# Altium PCB MCU_project.PcbDoc
Units mil, origin at the board's own origin, x right, y up, seen from the top; angles counter-clockwise.
Board outline 2320.01 x 2455.03 mil, 2 copper layers (Top Layer, Bottom Layer); 50 components, 37 nets, 208 pads, 1 vias.
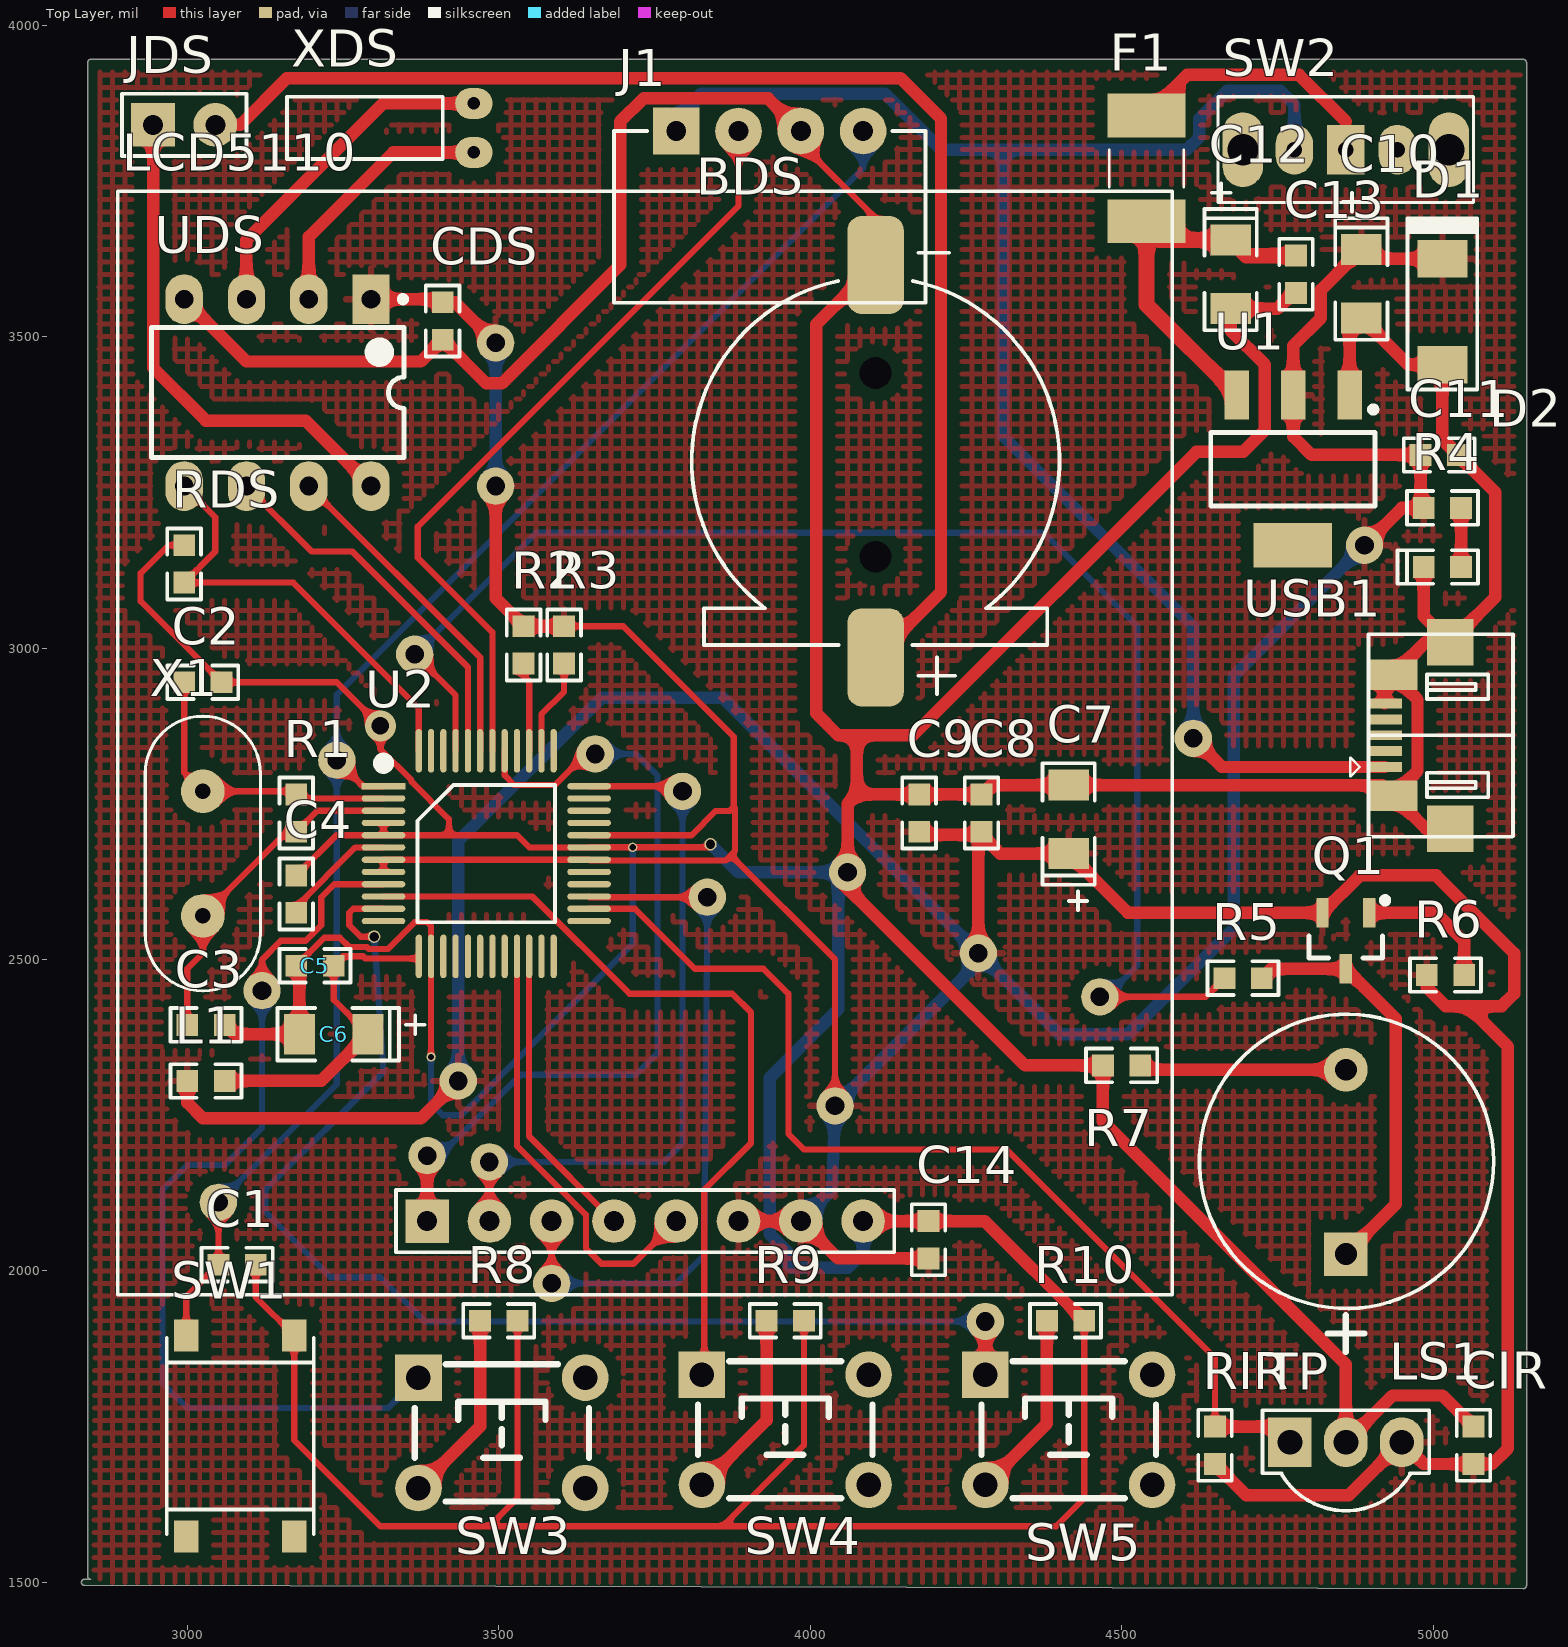
[diagram p0: Top Layer view]
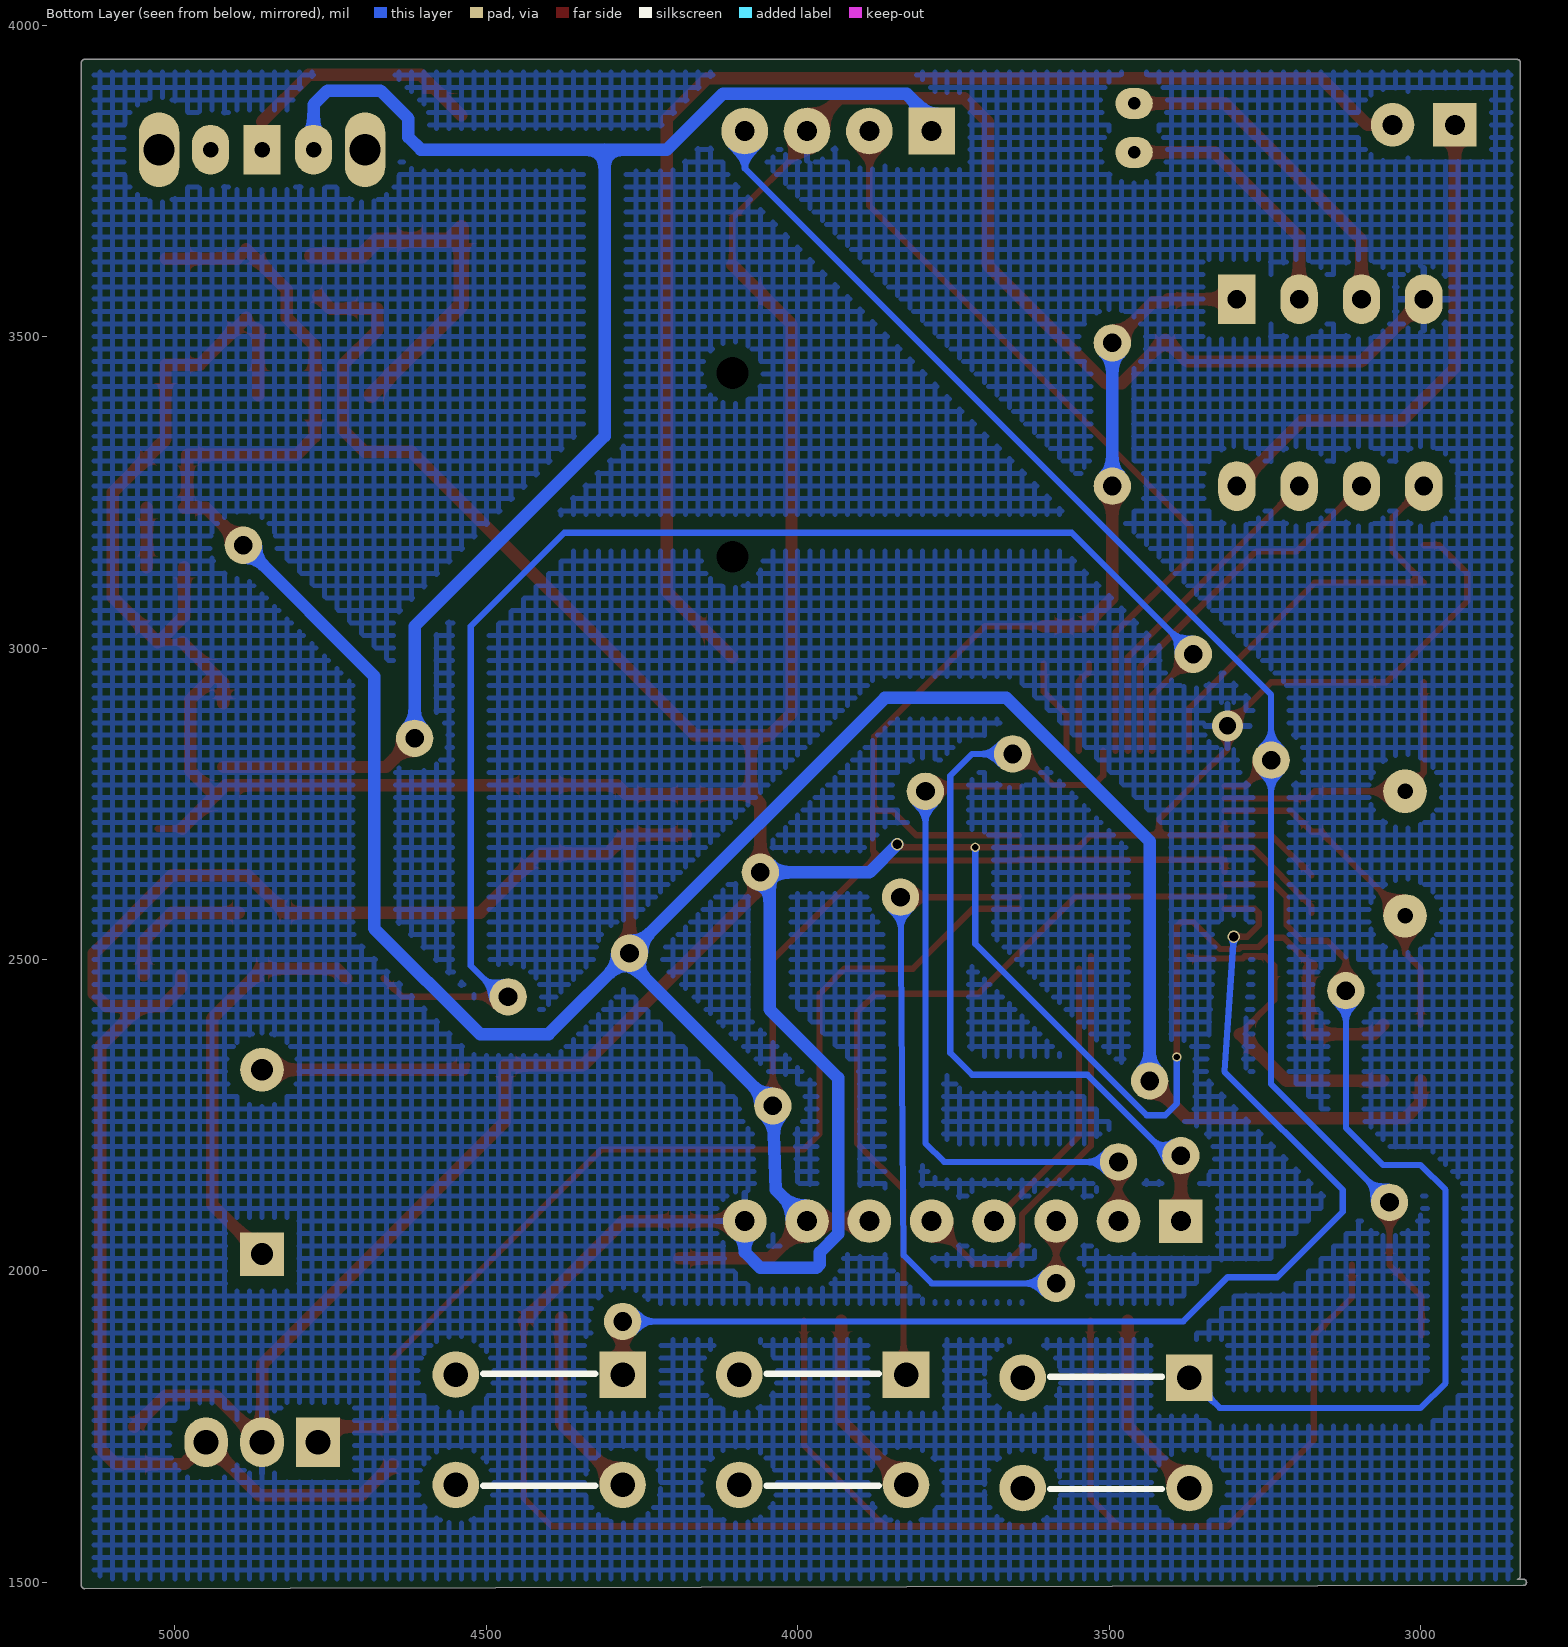
[diagram p1: Bottom Layer view, seen from below]

## Layer stack, top to bottom
Top Solder: solder mask 0.4, Solder Resist, Dk 3.5
Top Layer: signal copper 1.4
Dielectric 1: dielectric 12.6, FR-4, Dk 4.8
Bottom Layer: signal copper 1.4
Bottom Solder: solder mask 0.4, Solder Resist, Dk 3.5

## Board outline
2834.99,1494.98 cw(c2835,1500) 2835.01,1505.02 2844.7,1504.99 cw(c2845,1510) 2839.99,1510 2839.99,3940 cw(c2845,3940) 2845,3945.01 5145,3945.01 cw(c5145,3940) 5150.02,3940 5150.02,1495 cw(c5145,1495) 5144.99,1489.98

## Design rules (kind name [scope] priority, off if disabled: settings)
Clearance [All] p1: gap=5 except(20: Arc-Poly Track-Poly SMDPad-Poly THPad-Poly Via-Poly Fill-Poly Poly-Poly)
DiffPairsRouting [All] p1: maxlimit=10 minlimit=5 mostfreqgap=10 toplayer_minwidth=15 toplayer_maxwidth=15 toplayer_prefwidth=15 bottomlayer_minwidth=15 bottomlayer_maxwidth=15 bottomlayer_prefwidth=15 maxuncoupledlength=500
PolygonConnect [All] p1: connectstyle=Relief reliefconductorwidth=10 reliefentries=4 polygonreliefangle="90 Angle" airgapwidth=10
RoutingVias [All] p1: holewidth=28 width=50 viastyle="Through Hole" minholewidth=28 minwidth=50 maxholewidth=28 maxwidth=50
SolderMaskExpansion [All] p1: expansion=4
Width [All] p1: maxlimit=40 minlimit=5 preferedwidth=10 minimp=50.000000 maximp=50.000000 favimp=50.000000
29 further rules are at their usual default settings.

## Components (designator, comment, footprint, x,y, rotation, side; value= is the part's Value field where it differs from the comment)
BDS "CR1220" CR1220-贴片 4105,3300 r0 top
C1 "CAP - 无极性" 0603 3080,2010 r180 top
C2 "CAP - 无极性" 0603 3025,2945 r180 top
C3 "CAP - 无极性" 0603 3030,2395 r180 top
C4 "CAP - 无极性" 0603 3175,2605 r270 top
C5 "CAP - 无极性" 0603 3205,2490 r180 top
C6 "CAP - 有极性" 1206(-+) 3235,2380 r0 top
C7 "CAP - 有极性" 1206(-+) 4415,2725 r270 top
C8 "CAP - 无极性" 0603 4275,2735 r90 top
C9 "CAP - 无极性" 0603 4175,2735 r90 top
C10 "CAP - 有极性" 1206(-+) 4885,3585 r90 top
C11 "CAP - 无极性" 0603 5010,3310 r0 top
C12 "CAP - 有极性" 1206(-+) 4675,3600 r90 top
C13 "CAP - 无极性" 0603 4780,3600 r90 top
C14 "CAP - 无极性" 0603 4190,2050 r90 top
CDS "CAP - 无极性" 0603 3410,3525 r270 top
CIR "CAP - 无极性" 0603 5065,1720 r90 top
D1 "SS14" SMA 5015,3540 r90 top
D2 "LED绿" 0603(+-) 5015,3130 r180 top
F1 "FUSE" 1812 4540,3770 r270 top
J1 "ST-Link" HEADER_1*4P_XH2.54_卧式 3935,3830 r90 top
JDS "HEADER_1*2P" HEADER_1*2P 2995,3840 r90 top
L1 "L磁珠/电感" 0603 3030,2305 r0 top
LCD5110 "LCD5110" LCD5110 3735,2080 r0 top
LS1 "蜂鸣器" 蜂鸣器 4860,2175 r90 top
Q1 "SS8550" SOT23-3N 4860,2530 r180 top
R1 "Res - SMD" 0603 3175,2735 r90 top
R2 "Res - SMD" 0603 3540,3005 r90 top
R3 "Res - SMD" 0603 3605,3005 r90 top
R4 "Res - SMD" 0603 5015,3225 r0 top
R5 "Res - SMD" 0603 4695,2470 r0 top
R6 "Res - SMD" 0603 5020,2475 r180 top
R7 "Res - SMD" 0603 4500,2330 r0 top
R8 "Res - SMD" 0603 3500,1920 r180 top
R9 "Res - SMD" 0603 3960,1920 r0 top
R10 "Res - SMD" 0603 4410,1920 r0 top
RDS "Res - SMD" 0603 2995,3135 r90 top
RIR "Res - SMD" 0603 4650,1720 r90 top
SW1 "Switch - 轻触" "Switch - 轻触SMD_4Pins" 3085,1735 r270 top
SW2 "Switch - 拨动-三脚两档" "Switch - 拨动-三脚两档" 4860,3800 r0 top
SW3 "6x6x5" "TSW DIP-6*6*6" 3505,1740 r0 top
SW4 "6x6x5" "TSW DIP-6*6*6" 3960,1745 r0 top
SW5 "6x6x5" "TSW DIP-6*6*6" 4415,1745 r0 top
TP "TL1838" 红外遥控接收头 4860,1725 r0 top
U1 "AMS1117" SOT223_L 4775,3295 r90 top
U2 "STM8S105C6T6" LQFP48 3480,2670 r0 top
UDS "DS1302" DIP-8 3145,3410 r270 top
USB1 "USB-5P" USB-MICRO_A 5015,2860 r90 top
X1 "石英晶振" XTAL(4.88mm) 3025,2670 r90 top
XDS "石英晶振" XTAL(圆柱型2*6mm) 3460,3835 r180 top

## Footprints (in the part's own frame and the unit in brackets; to place one, negate y for a bottom-side part, rotate by r counter-clockwise, add the part's x,y. Pads: shape width x height; smd on the part's side, far side on the other; paste and mask are expansions set on the pad)
0603 [mil]
  rect 35x35 smd: 1(-30,0) 2(30,0)
  silkscreen extent -57,-27 57,27, body extent -30,-15 30,15, height 20
0603(+-) [mil]
  rect 35x35 smd: 1(-30,0) 2(30,0)
  silkscreen extent -57,-27 72,27, body extent -30,-15 30,15, height 20
1206(-+) [mil]
  rect 50x65 smd: 1(55,0) 2(-55,0)
  silkscreen extent -90,-42 146,42, body extent -59,-28 59,28, height 63
1812 [mil]
  rect 70x125 smd: 1(-85,0) 2(85,0)
  silkscreen extent -30,-60 30,60, body extent -90,-60 90,60, height 30
CR1220-贴片 [mm]
  round 0 hole 1.3: 0(0,3.6) 0(0,-3.9)
  rrect50% 2.3x4 smd: 1(0,-8) 2(0,8)
  silkscreen extent -7.5,-9.5 7.5,8.5
DIP-8 [mil]
  rect 80x60 hole 30: 1(-150,150)
  oval 80x60 hole 30: 2(-150,50) 3(-150,-50) 4(-150,-150) 5(150,-150) 6(150,-50) 7(150,50) 8(150,150)
  silkscreen extent -155,-203 104,206, body extent -142,-203 142,203, height 210
HEADER_1*2P [mil]
  rect 70x70 hole 32: 1(0,50)
  round 70 hole 32: 2(0,-50)
  silkscreen extent -50,-100 50,100, body extent -50,-100 50,100, height 457
HEADER_1*4P_XH2.54_卧式 [mil]
  rect 75x75 hole 32: 1(0,150)
  round 75 hole 32: 2(0,50) 3(0,-50) 4(0,-150)
  silkscreen extent -276,-250 0,250, body extent -14,-164 14,164, height 457
LCD5110 [mil]
  rect 70x70 hole 32: 1(-350,0)
  round 70 hole 32: 2(-250,0) 3(-150,0) 4(-50,0) 5(50,0) 6(150,0) 7(250,0) 8(350,0)
  silkscreen extent -846,-118 846,1654, body extent -846,-118 846,1654, height 551
LQFP48 [mil]
  rect 70x10 smd: 1(-165,108.27)
  oval 70x10 smd: 2(-165,88.58) 3(-165,68.9) 4(-165,49.21) 5(-165,29.53) 6(-165,9.84) 7(-165,-9.84) 8(-165,-29.53) 9(-165,-49.21) 10(-165,-68.9) 11(-165,-88.58) 12(-165,-108.27) 25(165,-108.27) 26(165,-88.58) 27(165,-68.9) 28(165,-49.21) 29(165,-29.53) 30(165,-9.84) 31(165,9.84) 32(165,29.53) 33(165,49.21) 34(165,68.9) 35(165,88.58) 36(165,108.27)
  oval 10x70 smd: 13(-108.27,-165) 14(-88.58,-165) 15(-68.9,-165) 16(-49.21,-165) 17(-29.53,-165) 18(-9.84,-165) 19(9.84,-165) 20(29.53,-165) 21(49.21,-165) 22(68.9,-165) 23(88.58,-165) 24(108.27,-165) 37(108.27,165) 38(88.58,165) 39(68.9,165) 40(49.21,165) 41(29.53,165) 42(9.84,165) 43(-9.84,165) 44(-29.53,165) 45(-49.21,165) 46(-68.9,165) 47(-88.58,165) 48(-108.27,165)
  silkscreen extent -173,-110 110,153, body extent -134,-135 135,134, height 61
SMA [mil]
  rect 60x80 smd: 1(-85,0) 2(85,0)
  silkscreen extent -125,-56 150,56, body extent -89,-50 91,50, height 78
SOT23-3N [mm] "3x1.3x1mm(长宽高)"
  rect 0.5x1.2 smd: 1(-0.95,-1.143) 2(0.95,-1.143) 3(0,1.143)
  silkscreen extent -1.73,-1.78 1.5,0.7, body extent -1.5,-1.2 1.5,1.2, height 1.05
SOT223_L [mm]
  rect 2x1 smd: 1(2.819,-2.314) 2(2.819,-0.014) 3(2.819,2.286)
  rect 1.8x3.2 smd: 4(-3.302,0)
  silkscreen extent -1.7,-3.4 2.36,3.35, body extent -2.05,-3.35 1.65,3.35, height 1.7
"Switch - 拨动-三脚两档" [mil]
  oval 65x120 hole 50: 0(-165.35,0) 4(165.35,0)
  oval 60x80 hole 25: 1(-82.68,0) 3(82.68,0)
  rect 60x80 hole 25: 2(0,0)
  silkscreen extent -205,-85 205,85, body extent -168,-80 170,80, height 280
"Switch - 轻触SMD_4Pins" [mm]
  rect 1.3x1 smd: 1(-4.1,2.2) 2(-4.1,-2.2) 3(4.1,-2.2) 4(4.1,2.2)
  silkscreen extent -4,-3 4,3, body extent -3.03,-2.97 2.97,3.03, height 4.57
"TSW DIP-6*6*6" [mm] "6*6*6mm"
  rect 1.9x1.9 hole 1: 1(-3.4,2.25)
  round 1.9 hole 1: 2(-3.4,-2.25) 3(3.4,-2.25) 4(3.4,2.25)
  silkscreen extent -3.56,-2.79 3.56,2.79, body extent -4.11,-3 4.11,3, height 5.95
USB-MICRO_A [mm] "micro型USB ，5.9*8.2*2.5mm"
  rect 0.4x1.4 smd: 1(-1.296,2.355) 2(-0.648,2.355) 3(0,2.355) 4(0.648,2.355) 5(1.295,2.355)
  rect 1.9x1.9 smd: 5(-3.81,-0.312) 5(3.784,-0.312)
  rect 1.25x2 smd: 5(-2.464,2.025) 5(2.464,2.025)
  silkscreen extent -4.14,-2.89 4.11,3.75, body extent -3.98,-2.77 3.98,2.65, height 2.69
XTAL(4.88mm) [mil]
  round 70 hole 25: 1(-100,0) 2(100,0)
  silkscreen extent -220,-93 220,93, body extent -216,-92 217,92, height 130
XTAL(圆柱型2*6mm) [mil]
  oval 60x50 hole 20: 1(0,39.37) 2(0,-39.37)
  silkscreen extent 50,-50 300,50
红外遥控接收头 [mil]
  rect 70x80 hole 40: 1(-89.76,0)
  oval 70x80 hole 40: 2(0,0) 3(89.76,0)
  silkscreen extent -134,-110 134,51
蜂鸣器 [mil]
  rect 70x70 hole 35: 1(-148,0)
  round 70 hole 35: 2(148,0)
  silkscreen extent -305,-237 237,235, body extent -228,-231 230,228, height 354

## Part data
BDS: library part Battery
D1: library part "Diode - Normal"
D2: library part LED
F1: library part FUSE保险丝
J1: library part HEADER_1*4P_1
Q1: library part 8550-SMD, "高频放大-PNP型"
SW3 SW4 SW5: library part "TSW DIP-6x6", "直插6x6轻触开关"
TP: library part TL1838-红外解码
USB1: "微型USB母座"
XDS: library part 石英晶振_1

## Free pads (board coordinates)
  round 60 hole 30: 2(3585,1980) 3(3835,2600) 4(3485,2175) 6(3795,2770) 7(3385,2185) 8(3655,2830) 9(3050,2110) 10(3240,2820) 11(3120,2450) 12(4281.14,1918.86) 14(3365,2990) 15(4465,2440) 17(3435,2305) 18(4040,2265) 19(4270,2510) 20(4890,3165) 25(4615,2855) 27(3495,3260) 28(3495,3490) 30(4060,2640)
  round 20 hole 15: 13(3300,2536.67) 29(3840,2685)
  round 15 hole 10: 31(3391.42,2343.58) 31(3715,2680)

## Via types
v1: diameter 50, hole 28, Top Layer to Bottom Layer, 1 vias

## Nets (pads, with @x,y where several pads share a name; then routed paths per layer and width w, separated by ;. In a path a pad name is that pad's centre, name@x,y a point inside that pad or via, vN(x,y) a via of type N, cw(c..) or ccw(c..) an arc to the next point about the centre after c; other vN are vias at no path point)
3.3V: C7.1 C8.1 C9.1 C10.1 C11.1 C14.1 CDS.1 CIR.1 D1.2 L1.1 LCD5110.6 LCD5110.7 pad.17 pad.18 pad.19 pad.20 pad.27 pad.28 Q1.2 R2.2 R3.2 R4.1 R6.2 RIR.1 TP.3 U1.2 U2.7 U2.8 U2.30 U2.32 UDS.1 | length 10423.6
  Top Layer w10: U2.8 U2.7 U2.30 3646.37,2658.79 3863.79,2658.79 3872.5,2667.5 ; R3.2 3700,3035 3877.42,2857.58 3877.42,2745 ; U2.32 3809.53,2699.53 3848.56,2738.56 3870.98,2738.56 3877.42,2745 ; pad.18 4040,2500 3872.5,2667.5 ; 3872.5,2667.5 3879.11,2674.11 3879.11,2716.69 3879.11,2743.31 3877.42,2745
  Top Layer w20: L1.1 3000,2270 3025,2245 3375,2245 pad.17 ; UDS.1 3405,3560 CDS.1 3430,3555 pad.28 ; pad.27 3495,3080 R2.2 R3.2 ; LCD5110.6 LCD5110.7 4045,2020 C14.1 ; C9.1@4180,2700 C8.1@4275,2700 ; pad.19 4270,2695 C8.1@4275,2700 ; RIR.1 4700,1640 4864.76,1640 TP.3 4984.76,1690 CIR.1 5095,1690 5120,1715 5120,2360 5055,2425 ; pad.20 4950,3225 R4.1 4980,3230 C11.1 4805,3310 4775.55,3339.45 U1.2 4775.55,3485.55 4820,3530 4820,3575 C10.1 4900,3625 D1.2 ; R6.2 4990,2455 5020,2425 5055,2425 ; C8.1@4275,2700 4305,2670 C7.1 4510,2575 Q1.2 4882.6,2635 5005,2635 5130,2510 5130,2445 5110,2425 5055,2425
  Bottom Layer w20: pad.17 3435,2690 3665,2920 3860,2920 pad.19 ; pad.27 pad.28 ; LCD5110.7 4035,2130 pad.18 4270,2495 pad.19 ; pad.20 4680,2955 4680,2550 4510,2380 4400,2380 pad.19
BEEP: pad.14 pad.15 R5.1 U2.45 | length 2334.5
  Top Layer w10: pad.14 3430.79,2924.21 U2.45 ; pad.15 4635,2440 R5.1
  Bottom Layer w10: pad.14 3560,3185 4375,3185 4525,3035 4525,2490 pad.15@4460,2425
GND: BDS.2 C1.1 C2.1 C3.1 C4.1 C5.2 C6.2 C7.2 C8.2 C9.2 C10.2 C11.2 C12.2 C13.1 C14.2 CDS.2 CIR.2 D1.1 D2.2 J1.3 LCD5110.8 pad.29 pad.30 pad.31 R7.1 R8.1 R9.2 R10.2 RDS.2 SW1.1 TP.2 U1.1 U2.4 U2.5 U2.14 U2.31 UDS.4 USB1.5 | length 14962.5
  Top Layer w10: RDS.2 2970,3165 2925,3120 2925,3075 C2.1 3240,2945 v1(3310,2875) 3310,2837.41 3360,2787.41 3360,2785 3420,2725 3420,2699.53 ; C1.1 3110,1958.03 SW1.1 3171.61,1728.39 3310,1590 3485,1590 ; C5.2 3220,2535 3245,2535 3260,2520 3288.38,2520 3291.72,2516.67 3321.67,2516.67 3365,2560 3385,2560 3391.42,2553.58 U2.14 pad.31@3391.42,2343.58 ; C4.1 3239.53,2699.53 U2.5 ; U2.4 U2.5 ; R8.1 3530,1635 3485,1590 ; pad.29@3840,2680 3715,2680 3645.16,2680 U2.31 3549.21,2679.84 3529.53,2699.53 3420,2699.53 ; J1.3 3985,3810 4105,3690 BDS.2 ; R9.2 3990,1720 3860,1590 ; R10.2 4440,1635 4395,1590 3860,1590 ; C10.2@4866.1,3511.1 C10.2 ; 4987.28,3008.99 USB1.5@5027.28,3008.99 ; 4988.28,2709.99 USB1.5@5027.28,2709.99 ; U2.5 3420,2699.53 ; 3485,1590 3860,1590
  Top Layer w20: UDS.4 3095,3460 3375,3460 CDS.2 3480,3425 3505,3425 3695,3615 3695,3845 3732.5,3882.5 3932.5,3882.5 J1.3 ; C3.1 3075,2380 C6.2 3180,2485 C5.2 ; LCD5110.8 C14.2 4280,2080 R10.2 ; BDS.2 4010,3519.96 4010,2895 4045,2860 4075,2860 ; C13.1@4770,3565 4750,3545 C12.2 4675,3510 4730,3455 4730,3350 4695,3315 4620,3315 4165,2860 4075,2860 ; U1.1 C10.2@4866.1,3511.1 ; C10.2 4960,3455 D1.1 5015,3335 C11.2 5100,3250 5100,3081.72 5027.28,3008.99 4985,3051.27 D2.2 ; USB1.5@4922.28,2910.99 4922.28,2943.99 USB1.5@4935.28,2956.99 ; 4987.28,3008.99 USB1.5@4935.28,2956.99 ; 4988.28,2709.99 USB1.5@4935.28,2762.99 ; CIR.2 5015,1800 4935,1800 TP.2 4860,1850 4470,2240 R7.1 4345,2330 4060,2615 pad.30 4060,2750 4075,2765 ; 4075,2765 C9.2 C8.2 4290,2780 C7.2 4918.27,2780 USB1.5@4935.28,2762.99 ; 4075,2765 4075,2860 ; USB1.5@4935.28,2762.99 4975,2802.72 4975,2917.27 USB1.5@4935.28,2956.99
  Bottom Layer w10: pad.31@3391.42,2343.58 3391.42,2268.58 3410,2250 3440,2250 3715,2525 pad.31@3715,2680
  Bottom Layer w20: pad.29 3885,2640 pad.30 4045,2625 4045,2420 3935,2310 3935,2059.29 3964.29,2030 3964.29,2010.71 3970,2005 4060,2005 4085,2030 LCD5110.8
INFR: RIR.2 TP.1 U2.26 | length 1676.2
  Top Layer w10: U2.26 3718.58,2581.42 3815,2485 3925,2485 3965,2445 3965,2220 3990,2195 4315,2195 4650,1860 RIR.2
  Top Layer w20: RIR.2 4745.24,1750 TP.1
LCD-D0: LCD5110.4 U2.22 | length 461.5
  Top Layer w10: U2.22@3548.58,2485 3548.58,2216.42 LCD5110.4
LCD-D1: LCD5110.5 U2.21 | length 698.3
  Top Layer w10: U2.21 3529.21,2200.79 3640,2090 3640,2036.36 3665,2011.36 3716.36,2011.36 LCD5110.5
LCD-EN: LCD5110.3 pad.2 pad.3 U2.27 | length 1129.1
  Top Layer w10: pad.2 LCD5110.3 ; U2.27 3646.1,2600 pad.3
  Bottom Layer w10: pad.2 3785,1980 3830,2025 pad.3
LCD-R/W: LCD5110.2 pad.4 pad.6 U2.36 | length 1140.9
  Top Layer w10: LCD5110.2 pad.4 ; U2.36 3786.73,2778.27 pad.6
  Bottom Layer w10: pad.4 3765,2175 3795,2205 pad.6 pad.6@3795,2775
LCD-RS: LCD5110.1 pad.7 pad.8 U2.41 | length 1325
  Top Layer w10: U2.41 3509.53,2795.47 3525,2780 3590,2780 3640,2830 pad.8
  Top Layer w20: LCD5110.1 pad.7
  Bottom Layer w10: pad.7 3405,2185 3535,2315 3720,2315 3755,2350 3755,2795 3720,2830 pad.8 pad.8@3645,2830
NetBDS_1: BDS.1 JDS.2 | length 2131.4
  Top Layer w20: JDS.2 3085,3840 3160,3915 4145,3915 4210,3850 4210,3090.04 BDS.1
NetC2_2: C2.2 R1.2 U2.2 X1.2 | length 482.2
  Top Layer w10: C2.2 2995,2800 X1.2 3170,2770 R1.2 3181.42,2758.58 U2.2
NetC3_2: C3.2 R1.1 U2.3 X1.1 | length 545.3
  Top Layer w10: C3.2 3000,2485 3025,2510 X1.1 3160,2705 R1.1 3208.9,2738.9 U2.3
NetC4_2: C4.2 U2.6 | length 189.3
  Top Layer w10: C4.2 3175,2585 3269.84,2679.84 U2.6
NetC5_1: C5.1 C6.1 L1.2 U2.13 | length 539.6
  Top Layer w10: C6.1 3235,2435 C5.1 3250,2505 3282.17,2505 3285.5,2501.67 3368.4,2501.67 U2.13
  Top Layer w20: L1.2 3215,2305 C6.1
NetC12_1: C12.1 C13.2 F1.2 U1.3 | length 587.7
  Top Layer w25: U1.3 4540,3551 4540,3675 4560,3655 C12.1 4700,3630 C13.2
NetD2_1: D2.1 R4.2 | length 95
  Top Layer w20: D2.1 R4.2
NetF1_1: F1.1 SW2.2 | length 423
  Top Layer w10: SW2.2 4860,3845
  Top Layer w20: F1.1 4605,3920 4785,3920 4860,3845
NetJDS_1: JDS.1 UDS.8 | length 818.7
  Top Layer w20: JDS.1 2945,3450 3030,3365 3190,3365 UDS.8
NetLS1_1: LS1.1 Q1.3 R5.2 | length 665.5
  Top Layer w20: R5.2 4740,2485 Q1.3 4940,2405 4940,2107 LS1.1
NetLS1_2: LS1.2 R7.2 | length 332.9
  Top Layer w10: R7.2 R7.2@4537,2323
  Top Layer w20: R7.2@4537,2323 LS1.2
NetQ1_1: Q1.1 R6.1 | length 226.2
  Top Layer w20: Q1.1 5005,2575 5050,2530 R6.1
NetR2_1: R2.1 U2.39 | length 146.8
  Top Layer w10: R2.1@3532.5,2975 3532.5,2962.5 3548.9,2946.1 U2.39
NetR3_1: R3.1 U2.38 | length 155.1
  Top Layer w10: U2.38 3568.58,2893.58 3605,2930 R3.1
NetR8_2: R8.2 SW3.2 | length 309.5
  Top Layer w20: SW3.2 3470,1750.28 R8.2
NetR9_1: R9.1 SW4.2 | length 306.6
  Top Layer w20: SW4.2 3930,1760.28 R9.1
NetR10_1: R10.1 SW5.2 | length 309.5
  Top Layer w20: SW5.2 4380,1755.28 R10.1@4380,1925
NetUDS_2: UDS.2 XDS.1 | length 421.2
  Top Layer w20: UDS.2 3195,3660 3330.63,3795.63 XDS.1
NetUDS_3: UDS.3 XDS.2 | length 550.9
  Top Layer w20: UDS.3 3095,3655 3314.37,3874.37 XDS.2
NRST: C1.2 J1.4 pad.9 pad.10 SW1.2 U2.1 | length 2476
  Top Layer w10: SW1.2 2998.39,1958.39 C1.2 pad.9 ; pad.10 3281.73,2778.27 U2.1
  Bottom Layer w10: pad.9 3240,2300 pad.10 3240,2925 4085,3770 J1.4
PA3: pad.11 SW3.1 U2.9 | length 1485.6
  Top Layer w10: pad.11@3120,2465 3120,2500 3150,2530 3190,2530 3215,2555 3215,2600 3235.79,2620.79 U2.9
  Bottom Layer w10: pad.11 3120,2230 3060,2170 3000,2170 2960,2130 2960,1820 3000,1780 3322.56,1780 SW3.1
PA4: SW4.1 U2.10 | length 1283.4
  Top Layer w10: U2.10 3553.9,2601.1 3710,2445 3875,2445 3905,2415 3905,2205 3830,2130 3830,1833.58 SW4.1
PA5: pad.12 pad.13 SW5.1 U2.11 | length 1960.5
  Top Layer w10: pad.13 3278.33,2536.67 3260,2555 3260,2575 3266.42,2581.42 U2.11
  Top Layer w20: SW5.1 pad.12
  Bottom Layer w10: pad.13 3315,2320 3125,2130 3125,2095 3230,1990 3310,1990 3381.14,1918.86 pad.12
RTC-CLK: U2.43 UDS.7 | length 539
  Top Layer w10: UDS.7 3470.16,2984.84 U2.43
RTC-I/O: U2.44 UDS.6 | length 610.3
  Top Layer w10: UDS.6 3200,3155 3265,3155 3450.47,2969.53 U2.44
RTC-RST: RDS.1 U2.48 UDS.5 | length 725
  Top Layer w10: UDS.5 3045,3210 3045,3155 RDS.1 3170,3105 3371.73,2903.27 U2.48
SWIM: J1.2 U2.42 | length 1258
  Top Layer w10: U2.42 3489.84,3025.16 3370,3145 3370,3195 3885,3710 J1.2
VCC_USB: J1.1 pad.25 SW2.1 USB1.1 | length 2602.5
  Top Layer w20: pad.25 4661.01,2808.99 USB1.1
  Bottom Layer w10: J1.1 J1.1@3785,3850
  Bottom Layer w20: J1.1@3785,3850 3825,3890 4120,3890 4210,3800 4310,3800 ; pad.25 4615,3035 4310,3340 4310,3800 ; SW2.1 4777.32,3872.32 4754.65,3895 4670,3895 4625,3850 4625,3820 4605,3800 4310,3800
pads on no net: BDS.0 SW1.3 SW1.4 SW2.0 SW2.3 SW2.4 SW3.3 SW3.4 SW4.3 SW4.4 SW5.3 SW5.4 U1.4 U2.12 U2.15 U2.16 U2.17 U2.18 U2.19 U2.20 U2.23 U2.24 U2.25 U2.28 U2.29 U2.33 U2.34 U2.35 U2.37 U2.40 U2.46 U2.47 USB1.2 USB1.3 USB1.4

## Polygon pours and split planes (outlines as drawn)
GND on Bottom Layer "AutoNaming" (hatched 90Degree grid 20 track 8, pour order 12): 2855,3930 2860,3925 5130,3925 5130,1520 5125,1515 5115,1505 2855,1505
3.3V on Top Layer "AutoNaming" (hatched 90Degree grid 20 track 8, pour order 14): 2860,3925 5135,3925 5140,3920 5130,3910 5130,1500 2865,1500 2850,1515

## Silkscreen, mask and mechanical layers (free items; w line width, h text height)
Mechanical 1:
  lines w10: 2845,3935 5135,3935 5140,3940 5140,1505 2850,1505 2850,3930 2845,3935